# Altium PCB Prekidaci.PcbDoc
Units mil, origin at the board's own origin, x right, y up, seen from the top; angles counter-clockwise.
Board outline 6000 x 4000 mil, 2 copper layers (Top Layer, Bottom Layer); 14 components, 0 nets, 52 pads, 0 vias.
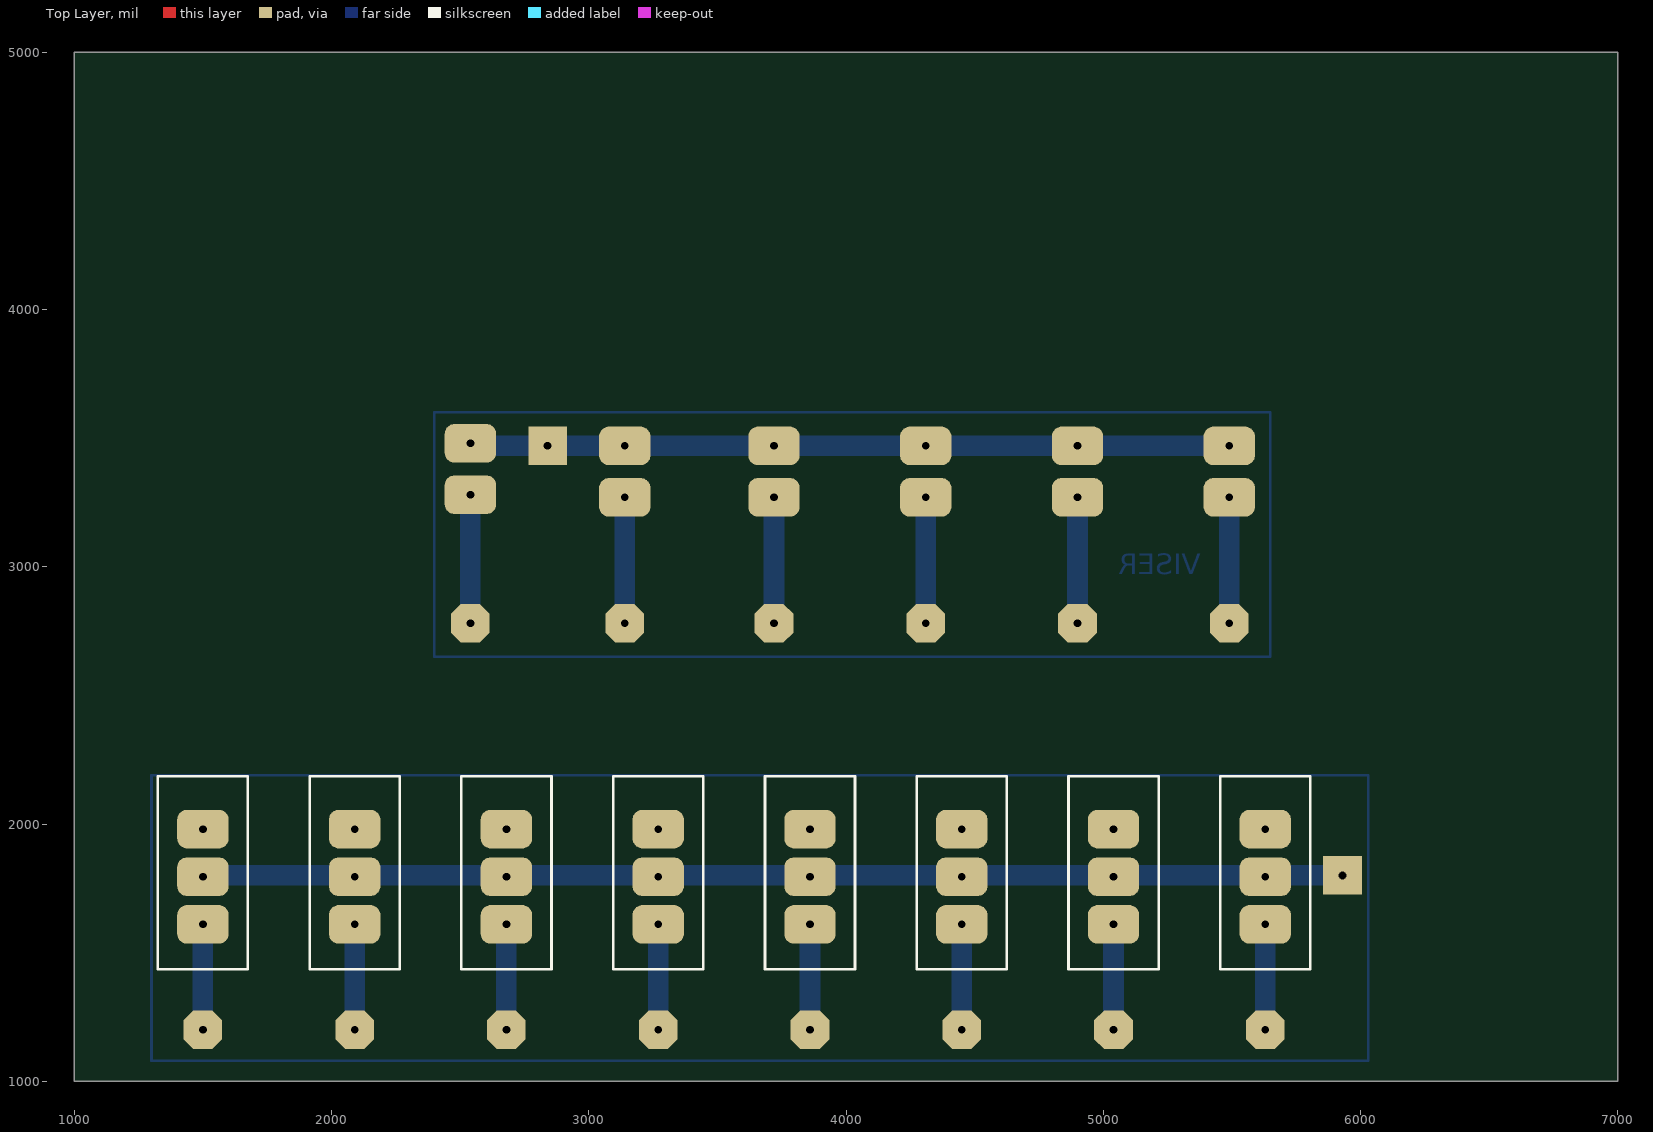
[diagram p0: Top Layer view]
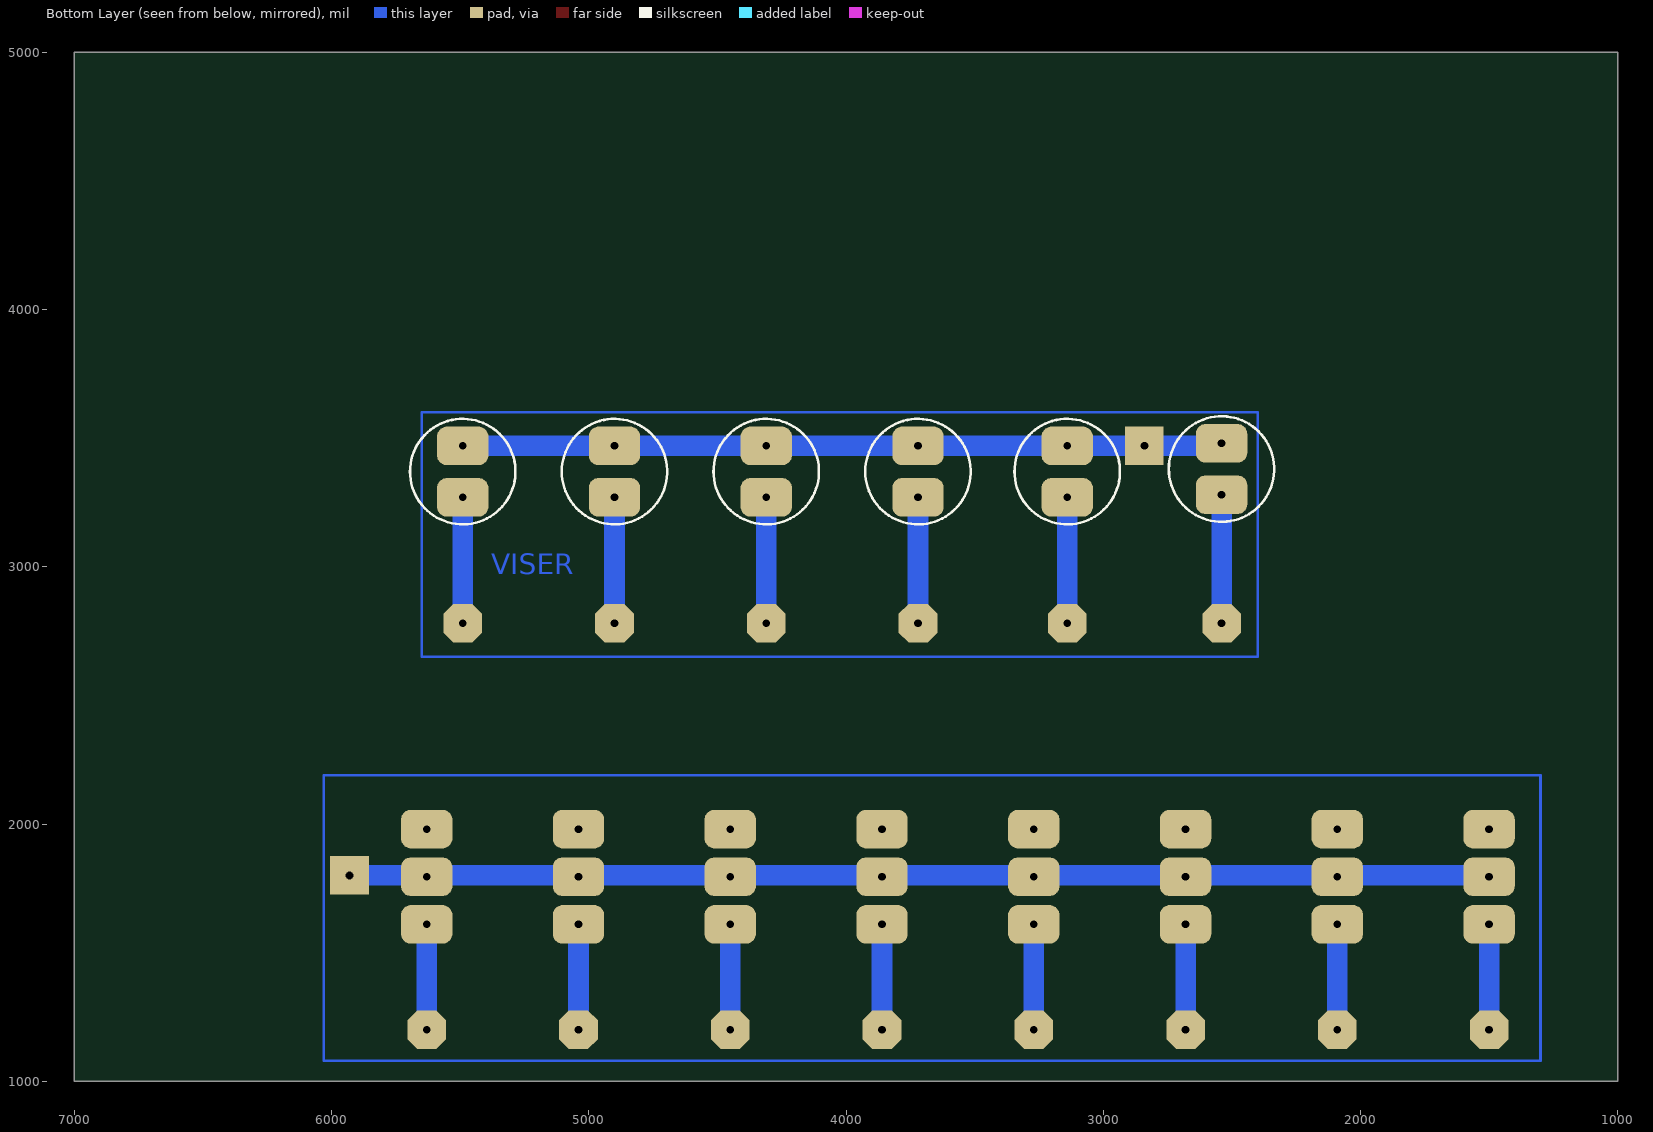
[diagram p1: Bottom Layer view, seen from below]

## Layer stack, top to bottom
Top Solder: solder mask 0.4, Solder Resist, Dk 3.5
Top Layer: signal copper 1.4
Dielectric 1: dielectric 12.6, FR-4, Dk 4.8
Bottom Layer: signal copper 1.4
Bottom Solder: solder mask 0.4, Solder Resist, Dk 3.5

## Board outline
1000,1000 7000,1000 7000,5000 1000,5000

## Design rules (kind name [scope] priority, off if disabled: settings)
Clearance [All] p1: gap=10
PolygonConnect [All] p1: connectstyle=Relief reliefconductorwidth=10 reliefentries=4 polygonreliefangle="90 Angle" airgapwidth=10
RoutingVias [All] p1: holewidth=28 width=50 viastyle="Through Hole" minholewidth=28 minwidth=50 maxholewidth=28 maxwidth=50
SolderMaskExpansion [All] p1: expansion=4
UnpouredPolygon [All] p1: allowunpoured=FALSE
Width [All] p1: maxlimit=10 minlimit=10 preferedwidth=10
29 further rules are at their usual default settings.

## Components (designator, comment, footprint, x,y, rotation, side; value= is the part's Value field where it differs from the comment)
? "Comment" taster1 2540,3280 r90 bottom
? "Comment" taster1 3140,3270 r90 bottom
? "Comment" taster1 3720,3270 r90 bottom
? "Comment" taster1 4310,3270 r90 bottom
? "Comment" taster1 4900,3270 r90 bottom
? "Comment" taster1 5490,3270 r90 bottom
? "Comment" prekidac 1500,1610 r90 top
? "Comment" prekidac 2090,1610 r90 top
? "Comment" prekidac 2680,1610 r90 top
? "Comment" prekidac 3270,1610 r90 top
? "Comment" prekidac 3860,1610 r90 top
? "Comment" prekidac 4450,1610 r90 top
? "Comment" prekidac 5040,1610 r90 top
? "Comment" prekidac 5630,1610 r90 top

## Footprints (in the part's own frame and the unit in brackets; to place one, negate y for a bottom-side part, rotate by r counter-clockwise, add the part's x,y. Pads: shape width x height; smd on the part's side, far side on the other; paste and mask are expansions set on the pad)
prekidac [mil]
  rrect50% 150x200 hole 30: 1(0,0) 2(185,0) 3(370,0)
  silkscreen extent -175,-175 575,175
taster1 [mil]
  rrect50% 150x200 hole 30: 1(0,0) 2(200,0)
  silkscreen extent -105,-205 305,205

## Free pads (board coordinates)
  rect 150x150 hole 30: 0(5930,1800) 35(2840,3470)
  oct 150x150 hole 30: 21(1500,1200) 22(2090,1200) 23(2680,1200) 24(3270,1200) 25(3860,1200) 26(4450,1200) 27(5040,1200) 28(5630,1200) 29(2540,2780) 30(3140,2780) 31(3720,2780) 32(4310,2780) 33(4900,2780) 34(5490,2780)

## Nets (pads, with @x,y where several pads share a name; then routed paths per layer and width w, separated by ;. In a path a pad name is that pad's centre, name@x,y a point inside that pad or via, vN(x,y) a via of type N, cw(c..) or ccw(c..) an arc to the next point about the centre after c; other vN are vias at no path point)
pads on no net: ?.1 ?.2 ?.3
copper on no net: | length 33690
  Bottom Layer w10: 1300,1080 1300,2190 6030,2190 6030,1080 1310,1080 1300,1080 ; 2400,2650 5650,2650 5650,3600 2400,3600 2400,2680 2400,2650
  Bottom Layer w80: 1500,1200 1500,1610 ; 1500,1800 5630,1800 5930,1800 ; 2090,1200 2090,1610 ; 2540,2780 2540,3280 ; 2540,3470 5490,3470 ; 2680,1200 2680,1610 ; 3140,2780 3140,3270 ; 3270,1200 3270,1610 ; 3720,2780 3720,3270 ; 3860,1200 3860,1610 ; 4310,2780 4310,3270 ; 4450,1200 4450,1610 ; 4900,2780 4900,3270 ; 5040,1200 5040,1610 ; 5490,2780 5490,3270 ; 5630,1200 5630,1610

## Other copper
Bottom Layer:
  text "VISER" at 5380,2970 h80